# Altium PCB Microphone2.PcbDoc
Units mil, origin at the board's own origin, x right, y up, seen from the top; angles counter-clockwise.
Board outline 517.9 x 637.9 mil, 4 copper layers (Top Layer, GND, Signal Layer, Bottom Layer), stack 30.634 mil thick; 32 components, 23 nets, 87 pads, 20 vias.
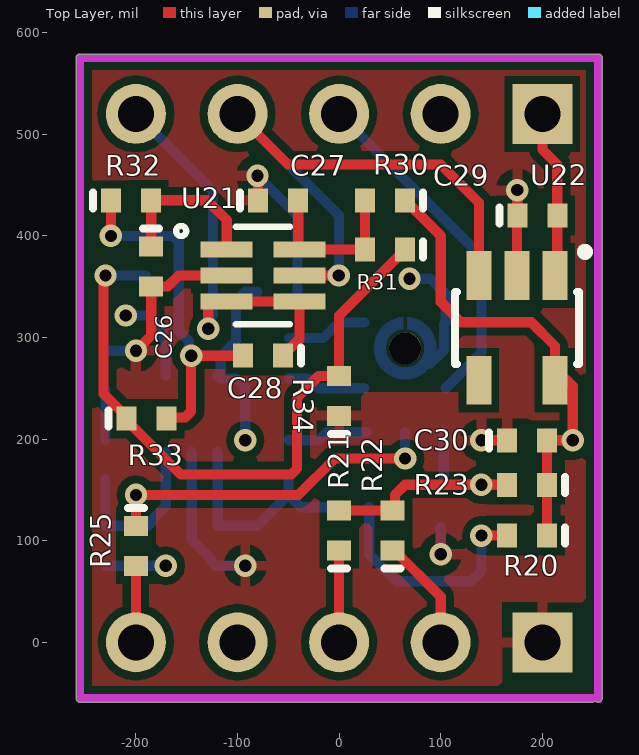
[diagram p0: Top Layer view]
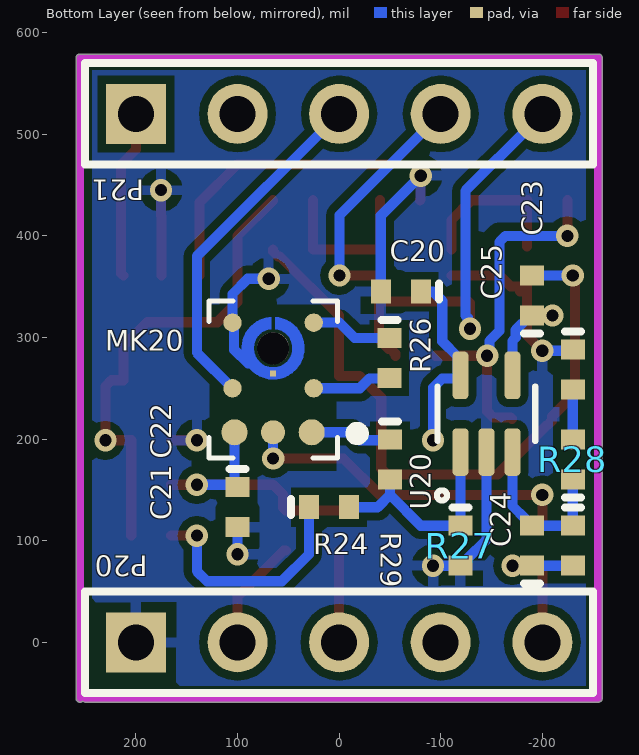
[diagram p1: Bottom Layer view, seen from below]
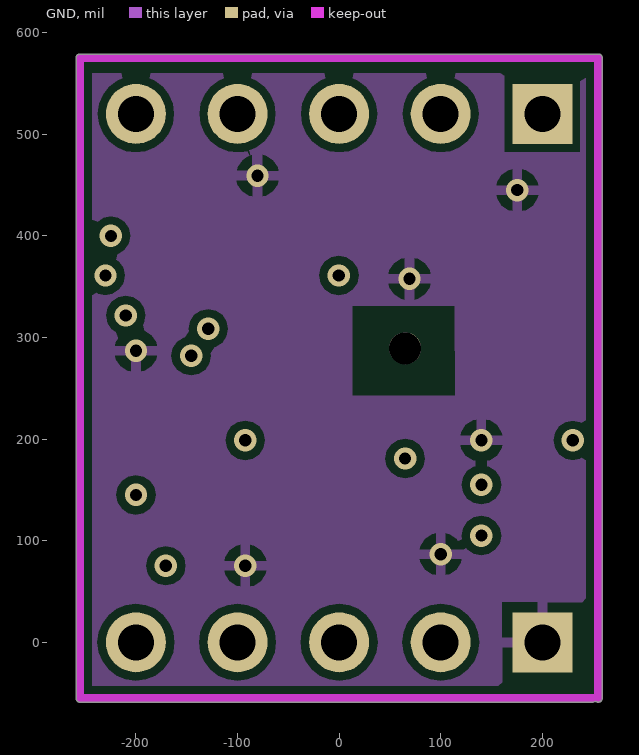
[diagram p2: GND]
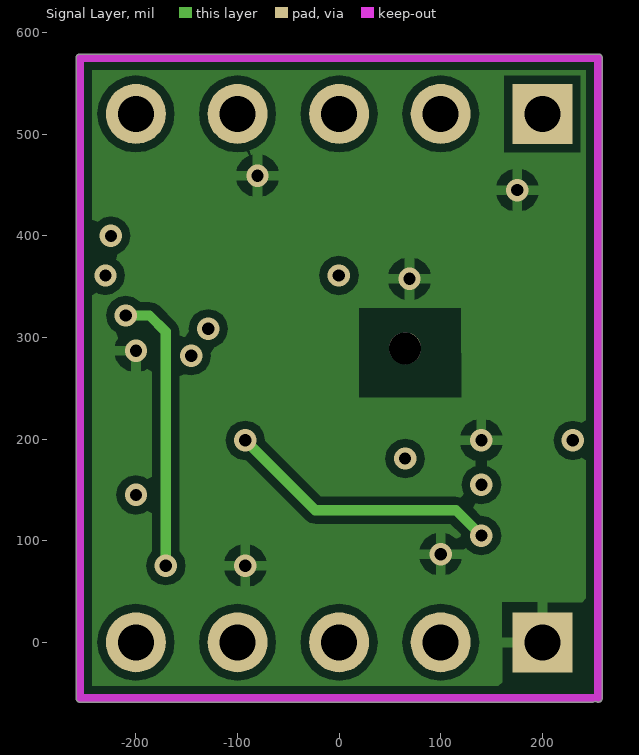
[diagram p3: Signal Layer]

## Layer stack, top to bottom
Top Solder: solder mask 0.4, Solder Resist, Dk 3.5
Top Layer: signal copper 1.4
Dielectric 1: core 10, FR-4, Dk 4.2
GND: signal copper 1.417
Dielectric 3: prepreg 5, Dk 4.2
Signal Layer: signal copper 1.417
Dielectric 2: core 10, Dk 4.2
Bottom Layer: signal copper 1.4
Bottom Solder: solder mask 0.4, Solder Resist, Dk 3.5

## Board outline
-258.95,-55 ccw(c-255,-55) -255,-58.95 250,-58.95 252.5,-58.06 ccw(c255,-55) 258.95,-55 258.95,575 ccw(c255,575) 255,578.95 -255,578.95 ccw(c-255,575) -258.95,575

## Design rules (kind name [scope] priority, off if disabled: settings)
Clearance Clearance_poly [InPolygon] p1: gap=8 ignorepadtopadclearanceinfootprint=TRUE
Clearance Clearance_1 [HasFootprint('*MIC_PMM-3738-VM1010-R')] p2: gap=6 ignorepadtopadclearanceinfootprint=FALSE except(0: Arc-Hole Track-Hole SMDPad-Hole THPad-Hole Via-Hole Fill-Hole Poly-Hole Region-Hole Text-Hole; 2: SMDPad-Region THPad-Region)
Clearance [All] p3: gap=6 ignorepadtopadclearanceinfootprint=TRUE
MinimumSolderMaskSliver [All] p1: minsoldermaskwidth=1
PolygonConnect [All] p1: connectstyle=Relief reliefconductorwidth=10 reliefentries=4 polygonreliefangle="90 Angle" airgapwidth=10
RoomDefinition Microphone2 [InComponentClass('Microphone2')] p1 off: confinementstyle=ConfineIn formatcopy=TRUE lockcomponents=FALSE outline -163.94,-68.94 -163.94,658.94 263.94,658.94 263.94,-68.94
RoutingVias [All] p1: holewidth=9.84 width=19.68 viastyle="Through Hole" minholewidth=7.87 minwidth=17.72 maxholewidth=19.68 maxwidth=39.37
SilkToSilkClearance [All] p1: silktosilkclearance=1
SilkToSolderMaskClearance [IsPad] p1: minsilkscreentomaskgap=1 clearancetoexposedcopper=TRUE
SolderMaskExpansion [All] p1: expansion=4 istentingtop=FALSE
Width [All] p1: maxlimit=10 minlimit=6 preferedwidth=10
27 further rules are at their usual default settings.

## Components (designator, comment, footprint, x,y, rotation, side; value= is the part's Value field where it differs from the comment)
C20 "0.1uF" 0402 -60.66,345 r0 bottom
C21 "0.1uF" 0402 100,132.94 r270 bottom
C22 "0" 0402 -50,180 r270 bottom
C23 "4.7uF" 0402 -230,268.6 r270 bottom
C24 "100pF" 0402 -190,95 r90 bottom
C25 "0" 0402 -190,341.3 r90 bottom
C26 "1nF" 0402 -185,370 r270 top
C27 "0.1uF" 0402 -60,435 r0 top
C28 "2nF" 0402 -75,282.05 r180 top
C29 "1uF" 0402 195,420 r0 top
C30 "1uF" 0402 185,198.75 r0 top
MK20 "PMM-3738-VM1010-R" MIC_PMM-3738-VM1010-R 64.96,260.63 r0 bottom
P20 "Header 5" HDR1X5 200,0 r180 bottom
P21 "Header 5" HDR1X5 200,520 r180 bottom
R20 "DNP" 0402 185,105 r180 top value=1M
R21 "DNP" 0402 0,110 r90 top value=1M
R22 "DNP" 0402 52.5,110 r90 top value=1M
R23 "DNP" 0402 185,155 r180 top value=1M
R24 "DNP" 0402 10,132.94 r180 bottom value=1M
R25 "0" 0402 -200,94.69 r270 top
R26 "26.1k" 0402 -49.37,279.85 r270 bottom
R27 "DNP" 0402 -119.41,95 r270 bottom value=1M
R28 "1k" 0402 -230,180 r90 bottom
R29 "75k" 0402 -230,95 r270 bottom
R30 "DNP" 0402 45.28,435 r180 top value=1M
R31 "DNP" 0402 45.28,386.57 r180 top value=1M
R32 "22k" 0402 -205,435 r0 top
R33 "22k" 0402 -189.69,220 r0 top
R34 "DNP" 0402 0,242.5 r90 top value=1M
U20 "MAX4466EXK" SOT65P210X110-5N -145,225 r90 bottom
U21 "MAX9911EXT" MAX9911EXT -75,360.98 r0 top
U22 "TPS7A0225PDBVR" SOT23-5 175,309.41 r180 top

## Footprints (in the part's own frame and the unit in brackets; to place one, negate y for a bottom-side part, rotate by r counter-clockwise, add the part's x,y. Pads: shape width x height; smd on the part's side, far side on the other; paste and mask are expansions set on the pad)
0402 [mm] "Surface Mount; Body 1 x 0.5 mm (LxW typ)"
  rect 0.5x0.6 smd: 1(-0.5,0) 2(0.5,0)
  silkscreen extent -0.95,-0.2 -0.95,0.2, body extent -0.5,-0.25 0.5,0.25, height 0.5
HDR1X5 [mm] "Connector; Header; 5 Position"
  rect 1.5x1.5 hole 0.9: 1(0,0)
  round 1.5 hole 0.9: 2(2.54,0) 3(5.08,0) 4(7.62,0) 5(10.16,0)
  silkscreen extent -1.27,-1.27 11.43,1.27
MAX9911EXT [mm]
  rect 1.3x0.4 smd: 1(-0.905,0.65) 2(-0.905,0) 3(-0.905,-0.65) 4(0.91,-0.65) 5(0.91,0) 6(0.91,0.65)
  silkscreen extent -2.17,-1.22 0.68,1.24
MIC_PMM-3738-VM1010-R [mm]
  round 0.65 smd: 1(-0.965,1.37) 6(0.965,1.37)
  round 0.46 smd: 2(-1.015,0.27) 3(-1.015,-1.37) 4(1.015,-1.37) 5(1.015,0.27)
  round 0.6 smd: 7(0,1.37)
  rect 0.15x0.15 smd: 8(0,-0.1)
  round 0.8 hole 0.8 unplated: None(0,-0.73)
  Top Layer region: 258 vertices and 0 holes, not listed, extent -0.78,-1.51 0.78,0.05
  silkscreen extent -2.24,-1.92 1.61,2.01
SOT23-5 [mm] "SOT23-5"
  rect 0.62x1.22 smd: 1(-0.95,-1.31) 2(0,-1.31) 3(0.95,-1.31) 4(0.95,1.31) 5(-0.95,1.31)
  silkscreen extent -1.8,-2 1.55,0.9, body extent -1.55,-0.9 1.55,0.9, height 1
SOT65P210X110-5N [mm]
  rrect50% 1.19x0.4 smd: 1(-0.96,0.65) 2(-0.96,0) 3(-0.96,-0.65) 4(0.96,-0.65) 5(0.96,0.65)
  silkscreen extent -2.17,-1.22 0.68,1.24

## Part data
C20 C21 C27: library part Cap, "Ceramic Capacitor (Surface Mount)", Digi-Key Part Number=490-4759-1-ND, Manufacturer="Murata Electronics North America", Manufacturer Part Number=GCM155R71C104KA55D, Rating=16V, Note="CAP CER 0.1UF 16V X7R 0402"
C22 C25 C29 C30: library part Cap, "Ceramic Capacitor (Surface Mount)", Digi-Key Part Number=311-0.0JRCT-ND, Manufacturer=Yageo, Manufacturer Part Number=RC0402JR-070RL
C23: library part Cap, "Ceramic Capacitor (Surface Mount)", Digi-Key Part Number=490-14306-1-ND, Manufacturer="Murata Electronics", Manufacturer Part Number=GRM155R61A475MEAAD, Rating=10V, Note="CAP CER 4.7UF 10V X5R 0402"
C24: library part Cap, "Ceramic Capacitor (Surface Mount)", Digi-Key Part Number=311-1024-1-ND, Manufacturer=Yageo, Manufacturer Part Number=CC0402JRNPO9BN101
C26: library part Cap, "Ceramic Capacitor (Surface Mount)", Digi-Key Part Number=490-4761-1-ND, Manufacturer="Murata Electronics", Manufacturer Part Number=GCM155R71H102KA37D, Rating=50V, Note="CAP CER 1000PF 50V X7R 0402"
C28: library part Cap, "Ceramic Capacitor (Surface Mount)", Digi-Key Part Number=478-10122-1-ND, Manufacturer="AVX Corporation", Manufacturer Part Number=04025C202JAT2A
MK20: "MEMS Microphone Omni-Directional 700 Ohm -38dBV 1.8V Rectangular Solder Pad T/R", Digi-Key Part Number=2022-1001-1-ND, Manufacturer="Vesper Technologies Inc.", Manufacturer Part Number=VM1010, Notes="PIEZOELETRIC MEMS MIC SINGLE-END"
P20 P21: "Header, 5-Pin", LatestRevisionDate=17-Jul-2002, LatestRevisionNote="Re-released for DXP Platform.", Publisher="Altium Limited"
R20 R21 R22 R23 R24 R27 R30 R31 R34: library part Res, "Chip Resistor (Surface Mount)", Digi-Key Part Number=311-1.00MLRCT-ND, Manufacturer=Yageo, Manufacturer Part Number=RC0402FR-071ML
R25: library part Res, "Chip Resistor (Surface Mount)", Digi-Key Part Number=311-0.0JRCT-ND, Manufacturer=Yageo, Manufacturer Part Number=RC0402JR-070RL
R26: library part Res, "Chip Resistor (Surface Mount)", Digi-Key Part Number=311-26.1KLRCT-ND, Manufacturer=Yageo, Manufacturer Part Number=RC0402FR-0726K1L
R28: library part Res, "Chip Resistor (Surface Mount)", Digi-Key Part Number=311-1.00KLRCT-ND, Manufacturer=Yageo, Manufacturer Part Number=RC0402FR-071KL
R29: library part Res, "Chip Resistor (Surface Mount)", Digi-Key Part Number=311-75KLRCT-ND, Manufacturer=Yageo, Manufacturer Part Number=RC0402FR-0775KL
R32 R33: library part Res, "Chip Resistor (Surface Mount)", Digi-Key Part Number=YAG4210CT-ND, Manufacturer=Yageo, Manufacturer Part Number=RT0402BRD0722KL
U20: "Audio Amp Microphone 1-CH Mono Class-AB 5-Pin SC70", Case/Package=SC, Input Bias Current=100nA, Input Offset Voltage (Vos)=5V, Manufacturer="Maxim Integrated", Manufacturer Part Number=MAX4466EXK+T, Max Operating Temperature=85°C, Max Power Dissipation=200mW, Max Supply Voltage=5.5V, Min Operating Temperature=-40°C, Min Supply Voltage=2.4V, Package Quantity=2500, Power Supply Rejection Ratio (PSRR)=112dB, Supplier Part Number 1=MAX4466EXK+CT-ND, Common Mode Rejection Ratio=80dB, ComponentLink1Description=http://datasheets.maximintegrated.com/en/ds/MAX4465-MAX4469.pdf?src-supplier=Avnet, ComponentLink1URL=http://datasheets.maximintegrated.com/en/ds/MAX4465-MAX4469.pdf?src-supplier=Avnet, ComponentLink2Description=http://datasheets.maximintegrated.com/en/ds/MAX4465-MAX4469.pdf?src-supplier=Digi-Key, ComponentLink2URL=http://datasheets.maximintegrated.com/en/ds/MAX4465-MAX4469.pdf?src-supplier=Digi-Key, ComponentLink3Description=http://datasheets.maximintegrated.com/en/ds/MAX4465-MAX4469.pdf?src-supplier=Avnet+Europe, ComponentLink3URL=http://datasheets.maximintegrated.com/en/ds/MAX4465-MAX4469.pdf?src-supplier=Avnet+Europe, Contact Plating=Tin,Matte, Gain Bandwidth Product=600kHz, Height=0.9mm, Length=2mm, Mount="Surface Mount", Number of Channels=1, Number of Pins=5, Operating Supply Voltage=5V, Packaging="Tape and Reel", Pricing 1="1=0.86, 10=0.752, 25=0.7068, 100=0.5358, 250=0.456, 500=0.4332, 1000=0.3306 (USD)", Radiation Hardening=No, REACH SVHC=Unknown, Stock 1=1912, Supplier 1=Digi-Key, Supply Type=Single, Weight=0.000705oz, Width=1.25mm
U21: "Operational amplifier; 1.8Ã·5.5VDC; Channels: 1; SC70-6", Case/Package=SC, Input Bias Current=1pA, Input Offset Voltage (Vos)=200uV, Manufacturer=Maxim, Manufacturer Part Number=MAX9911EXT+T, Max Frequency=1kHz, Max Operating Temperature=85°C, Max Power Dissipation=245mW, Max Supply Voltage=5.5V, Min Operating Temperature=-40°C, Min Supply Voltage=1.8V, Nominal Supply Current=4uA, Output Current=15mA, Package Quantity=2500, Supplier Part Number 1=MAX9911EXT+TCT-ND, Voltage Gain=120dB, Bandwidth=200kHz, Common Mode Rejection Ratio=70dB, ComponentLink1Description=https://datasheets.maximintegrated.com/en/ds/MAX9910-MAX9913.pdf?src-supplier=Digi-Key, ComponentLink1URL=https://datasheets.maximintegrated.com/en/ds/MAX9910-MAX9913.pdf?src-supplier=Digi-Key, ComponentLink2Description=https://media.digikey.com/pdf/Data%20Sheets/Maxim%20PDFs/PartNumberBreakdown_ds.pdf?src-supplier=Digi-Key, ComponentLink2URL=https://media.digikey.com/pdf/Data%20Sheets/Maxim%20PDFs/PartNumberBreakdown_ds.pdf?src-supplier=Digi-Key, ComponentLink3Description=http://datasheets.maxim-ic.com/en/ds/MAX9910-MAX9913.pdf?src-supplier=Avnet+Europe, ComponentLink3URL=http://datasheets.maxim-ic.com/en/ds/MAX9910-MAX9913.pdf?src-supplier=Avnet+Europe, Contact Plating=Gold, Gain Bandwidth Product=200kHz, Height=1mm, Lead Free="Lead Free", Length=2.15mm, Mount="Surface Mount", Number of Amplifiers=1, Number of Channels=1, Number of Circuits=1, Number of Pins=6, Operating Supply Current=4uA, Output Current per Channel=15mA, Packaging="Tape and Reel", Pricing 1="1=1, 10=0.893, 25=0.848, 100=0.6511, 250=0.57536, 500=0.54508, 1000=0.51912 (USD)", Radiation Hardening=No, REACH SVHC="No SVHC", Slew Rate=0.1V/µs, Stock 1=3380, Supplier 1=Digi-Key, Width=1.35mm
U22: library part TPS7A0218PDBVR, "IC REG LINEAR 1.8V 200MA SOT23-5"

## Via types
v1: diameter 22, hole 12, Top Layer to Bottom Layer, tented both sides, 20 vias

## Nets (pads, with @x,y where several pads share a name; then routed paths per layer and width w, separated by ;. In a path a pad name is that pad's centre, name@x,y a point inside that pad or via, vN(x,y) a via of type N, cw(c..) or ccw(c..) an arc to the next point about the centre after c; other vN are vias at no path point)
2V5: C30.2 R20.1 R23.1 R30.1 U22.5 | length 471
  Top Layer w10: R30.1 100,399.96 100,335 120,315 189.06,315 212.4,291.65 U22.5 224.14,257.84 230,251.98 v1(230,198.75) C30.2 R23.1 R20.1
Amp_EN: P21.4 U21.5 U22.3 | length 585.5
  Top Layer w10: P21.4 -50.31,470.31 100,470.31 137.6,432.72 U22.3 ; U21.5@-40,360.98 U21.5 v1(-0.3,360.98)
  Bottom Layer w10: P21.4 -0.3,420.3 v1(-0.3,360.98)
Amp_out: C24.1 C25.1 R29.2 U20.4 | length 423.7
  Signal Layer w10: v1(-210,321.61) -186.61,321.61 -170.59,305.59 v1(-170.59,75.31)
  Bottom Layer w10: R29.2 C24.1 v1(-170.59,75.31) ; v1(-210,321.61) -188.03,321.61 -173.86,307.44 -173.86,299.88 -170.59,296.62 U20.4
Audio_Out: C28.1 P21.5 U21.3 U21.4 | length 407.2
  Top Layer w10: v1(-128.81,308.58) -128.81,333.71 -127.13,335.39 U21.3 U21.4 -39.17,298.19 -48.51,288.86 -50.47,288.86 -55.32,284.02 C28.1
  Bottom Layer w10: P21.5@-190,510 -124.25,444.25 -124.25,321.62 -126.51,319.36 -126.51,310.87 v1(-128.81,308.58)
GND: C20.2 C21.2 C23.1 C26.2 C27.1 C29.1 C30.1 MK20.4 MK20.8 P20.1 R27.2 R34.1 U20.2 U21.2 U22.2 | length 744.1
  Top Layer w10: v1(-200,286.96) -185,301.96 C26.2 C26.2@-183.03,350.31 ; C26.2@-178.19,345.47 C26.2@-183.03,350.31 ; U21.2 -157.96,360.98 -168.63,350.31 C26.2@-183.03,350.31 ; v1(-80.35,459.23) -80.02,458.9 -80.02,435.33 C27.1 ; v1(140,198.75) C30.1 ; U22.2 175,419.68 C29.1 v1(175.31,445)
  Bottom Layer w10: C23.1 -228.68,286.96 v1(-200,286.96) ; U20.2 -145,100.9 -126.22,82.12 -126.22,80.16 -121.38,75.31 R27.2 v1(-92.39,75.31) ; v1(-80.35,459.23) -40.98,419.86 C20.2 ; v1(69.3,357.76) 90,357.76 104.92,342.84 MK20.4 103.37,313.01 103.37,287.95 89.77,274.34 ; v1(100,86.69) C21.2
Mic_PWR: P20.3 R21.1 | length 90.3
  Top Layer w10: P20.3 R21.1
Mode: MK20.5 P21.3 | length 342.5
  Bottom Layer w10: P21.3 140,380 140,285.08 MK20.5
NetC20_1: C20.1 R20.2 R24.1 U20.5 | length 692.4
  Top Layer w10: v1(140,105) R20.2
  Signal Layer w10: v1(-92.39,198.75) -23.64,130 115,130 v1(140,105)
  Bottom Layer w10: U20.5@-119.41,262.41 -116.54,259.54 -101.42,259.54 -92.39,250.5 v1(-92.39,198.75) ; U20.5 -116.54,265.67 -116.54,281.22 -101.42,296.33 -101.42,335.97 -92.39,345 C20.1 ; R24.1 29.69,86.69 56.38,60 130,60 140,70 v1(140,105)
NetC21_1: C21.1 MK20.6 R21.2 R22.2 R23.2 | length 272.9
  Top Layer w10: R21.2 R22.2 55,132.19 55,145.04 64.96,155 v1(140,155) R23.2
  Bottom Layer w10: MK20.6 102.95,155.57 102.38,155 v1(140,155)
NetC22_1: C22.1 MK20.1 | length 80.6
  Bottom Layer w10: C22.1 -49.06,198.75 -20,198.75 -12.06,206.69 MK20.1
NetC22_2: C22.2 R24.2 R27.1 U20.1 | length 216
  Bottom Layer w10: U20.1 R27.1 -80.36,114.68 -50,145.04 ; C22.2@-49.37,159.69 C22.2 -50,145.04 ; R24.2 -37.9,132.94 -50,145.04
NetC23_2: C23.2 R28.2 | length 49.2
  Bottom Layer w10: R28.2 C23.2
NetC24_2: C24.2 R28.1 R29.1 U20.3 | length 167.3
  Bottom Layer w10: R28.1 R29.1 C24.2 -188.03,114.69 -183.19,119.53 -183.19,121.5 -170.59,134.1 U20.3
NetC25_2: C25.2 R31.1 R33.1 R34.2 | length 658.1
  Top Layer w10: v1(-230,360.98) -232,358.99 -232,244.6 -209.37,221.97 -209.37,218.03 -204.53,213.19 -203.86,213.19 -155.67,165 -47.33,165 -41.47,170.86 -41.47,240.71 -20,262.18 R34.2 0,321.61 58.15,379.76 60.12,379.76 64.96,384.61 R31.1
  Bottom Layer w10: v1(-230,360.98) C25.2
NetC26_1: C26.1 R32.2 U21.1 | length 157.2
  Top Layer w10: C26.1 -185,434.69 R32.2 -130,435 -110.63,415.63 U21.1
NetC27_2: C27.2 R30.2 R31.2 U21.6 | length 162.1
  Top Layer w10: C27.2 -40.31,387.71 U21.6 R31.2 R30.2
NetC28_2: C28.2 R32.1 R33.2 | length 354.6
  Top Layer w10: v1(-224.68,399.96) R32.1 ; R33.2 -168.63,221.37 -151.5,221.37 -145.65,227.23 v1(-145.65,281.98) v1(-145.65,281.98) C28.2
  Bottom Layer w10: v1(-224.68,399.96) -163.72,399.96 -157.86,394.1 -157.86,306.51 -147.94,296.6 -147.94,284.27 v1(-145.65,281.98)
NetMK20_2: MK20.2 R26.2 | length 78.6
  Bottom Layer w10: R26.2 -48.92,259.72 -30,259.72 -20.28,250 MK20.2
NetMK20_3: MK20.3 R26.1 | length 80.6
  Bottom Layer w10: R26.1 -15.33,299.53 -0.3,314.57 MK20.3
NetMK20_7: MK20.7 R25.1 | length 336.3
  Top Layer w10: R25.1 v1(-200,145.04) -39.96,145.04 -4.14,180.86 v1(64.96,180.86)
  Bottom Layer w10: v1(64.96,180.86) MK20.7
Trigger: P20.5 R25.2 | length 75
  Top Layer w10: P20.5 R25.2
VCC: C29.2 P21.1 U22.1 | length 166
  Top Layer w10: P21.1 200,485 214.69,470.31 214.69,363.27 U22.1
VREG: P20.2 R22.1 | length 111.1
  Top Layer w10: R22.1 54.47,90.31 100,44.78 P20.2
pads on no net: MK20.None P20.4 P21.2 U22.4

## Polygon pours and split planes (outlines as drawn)
GND on Bottom Layer "Bottom Layer-GND" (solid, pour order 0): 255,565 255,-55 -255,-55 -255,565
GND on Signal Layer "Signal Layer-GND" (solid, pour order 2): 255,565 255,-55 -250,-55 -250,565
GND on Top Layer "Top Layer-GND" (solid, pour order 4): 255,565 255,-55 -255,-55 -255,565
GND on GND "GND-GND" (solid, pour order 6): 255,560 255,-55 -255,-55 -255,560

## Keep-outs
Keep-Out Layer:
  lines w7.87: 250,-55 -255,-55 -255,575 255,575 255,-55

## Other copper
Top Layer:
  pour cut-out: 117.02,333.6 17.38,333.6 17.38,246.1 117.77,246.1
GND:
  pour cut-out: 113.2,330.71 13.57,330.71 13.57,243.21 113.95,243.21
Signal Layer:
  pour cut-out: 119.65,328.75 20.02,328.75 20.02,241.25 120.4,241.25
Bottom Layer:
  pour cut-out: 127.78,332.88 127.78,171.24 124.81,168.27 2.36,168.27 2.36,331.73 3.51,332.88

## Silkscreen, mask and mechanical layers (free items; w line width, h text height)
Mechanical 1:
  lines w10: 250,-55 -255,-55 -255,580.38 254.69,579.56 254.69,-55